# EAGLE board Entrance v0.2 (EAGLE 9.6.2)
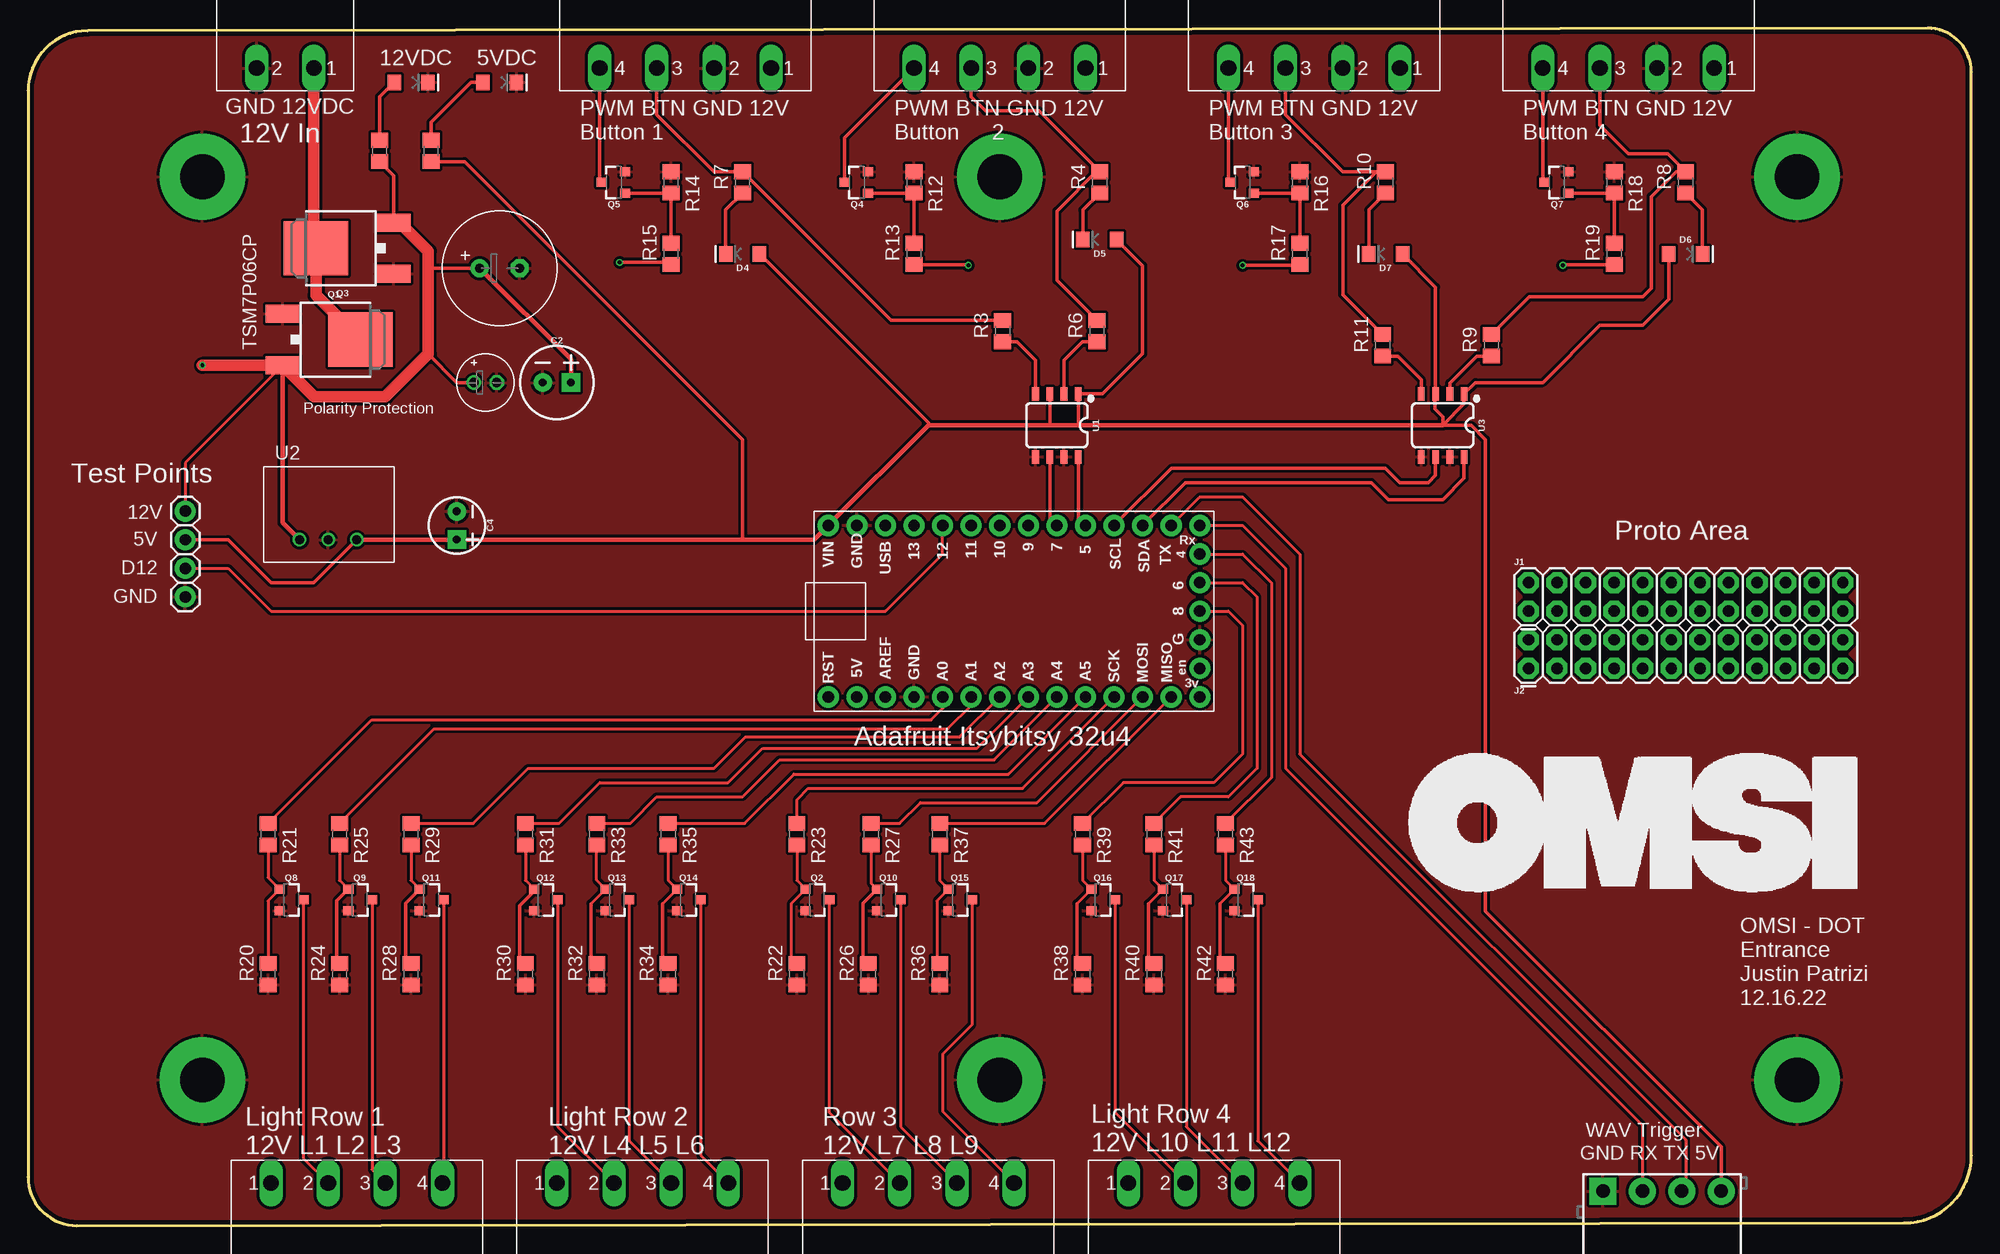
[diagram p0: board, top side]
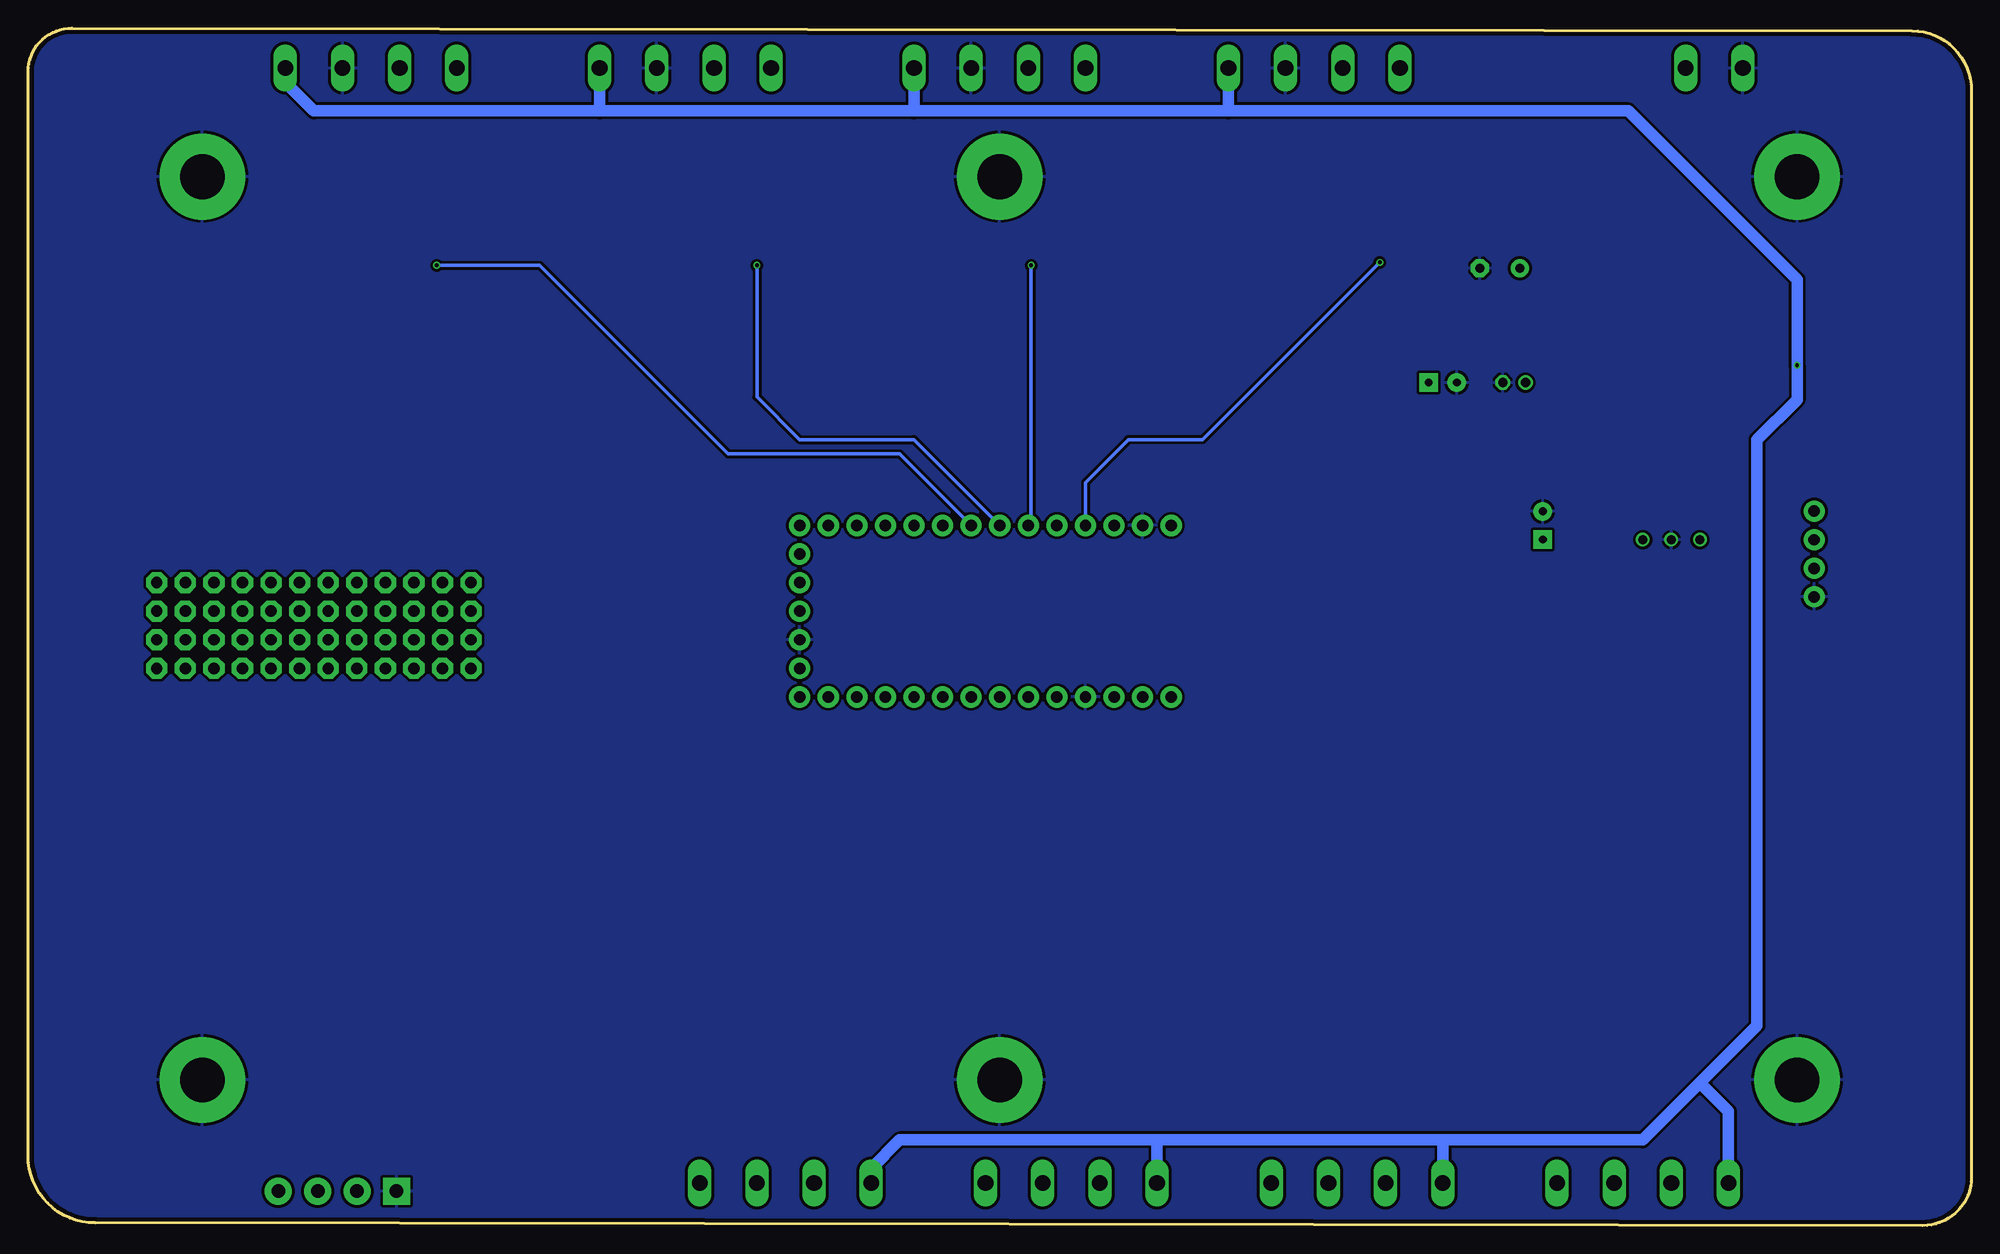
[diagram p1: board, bottom side, seen from below]

Size 172.72 x 106.41 mm. Coordinates in mm from the lower left corner, seen from the top.
Outline: 168.83,106.41 5.28,106.17 arc90 0,100.89 0,4.33 arc90 4.33,0 166.75,0.24 arc90 172.72,6.22 172.72,102.53 arc90 168.83,106.41
Copper layers (1*16): Top 0.035559375mm / dielectric 1.6mm / Bottom 0.035559375mm
Design rules "oshpark-2layer (1) *": minimum track width 10mil, minimum drill 10mil, track to track 8mil, track to pad 8mil, pad to pad 8mil, via to via 8mil, smd to smd 8mil, copper to edge 15mil, drill to drill 6mil, minimum pad ring 5mil, minimum via ring 5mil, stop-mask expansion 2.5mil, vias tented up to drill 25mil, thermal gap 10mil

## Footprints (pad centres in the part's own frame; a part is rotated, then mirrored left to right if it is on the bottom)
1X01 = drill 1.016 pad 1.88: 1 0,0
E2-5 = drill 0.813 pad 1.27: + -1.016,0 | drill 0.813 pad 1.27 octagon: - 1.016,0
CPOL-RADIAL-2.5MM-6.5MM = drill 0.7 pad 1.651 square: 1 1.25,0 | drill 0.7 pad 1.651: 2 -1.25,0
E3,5-10 = drill 0.813 pad 1.6: + -1.778,0 | drill 0.813 pad 1.6 octagon: - 1.778,0
CPOL-RADIAL-2.5MM-5MM-KIT = drill 0.7 pad 1.651 square: 1 1.25,0 | drill 0.7 pad 1.651: 2 -1.25,0
SPARKFUN-LED_LED-1206 = smd 1.2 x 1.4: A -1.5,0; C 1.5,0
LED-1206 = smd 1.2 x 1.4: A -1.5,0; C 1.5,0
2X12 = drill 1.016 pad 1.88 octagon: 1 0,0; 2 0,2.54; 3 2.54,0; 4 2.54,2.54; 5 5.08,0; 6 5.08,2.54; 7 7.62,0; 8 7.62,2.54; 9 10.16,0; 10 10.16,2.54; 11 12.7,0; 12 12.7,2.54; 13 15.24,0; 14 15.24,2.54; 15 17.78,0; 16 17.78,2.54; 17 20.32,0; 18 20.32,2.54; 19 22.86,0; 20 22.86,2.54; 21 25.4,0; 22 25.4,2.54; 23 27.94,0; 24 27.94,2.54
1X04_3.5MM_RA = drill 1.2 pad 2.413 square: 1 -0.228,0.023 | drill 1.2 pad 2.413: 2 3.272,0.023; 3 6.772,0.023; 4 10.272,0.023
DPAK@1 = smd 1.6 x 3: 1 -2.28,-5.31; 3 2.28,-5.31 | smd 4.826 x 5.715: 4 0,1.588
SOT23-3 = smd 0.8 x 0.9: 1 -0.95,-1; 2 0.95,-1; 3 0,1.1
R0805 = smd 1.3 x 1.5: 1 -0.95,0; 2 0.95,0
STANDOFF_ELECTRICAL_5_32 = drill 3.969 pad 7.62: P1 0,0
SO08@1 = smd 0.6 x 1.2: 1 -1.905,-2.8; 2 -0.635,-2.8; 3 0.635,-2.8; 4 1.905,-2.8; 5 1.905,2.8; 6 0.635,2.8; 7 -0.635,2.8; 8 -1.905,2.8
DC-DC_CONVERTER_78XX = drill 0.8: GND 0,0; VIN -2.54,0; VOUT 2.54,0
ADAFRUIT_LENOARDO = drill 1.016 pad 1.88: 3V -10.16,-21.59; 5V -10.16,8.89; A0 -10.16,1.27; A1 -10.16,-1.27; A2 -10.16,-3.81; A3 -10.16,-6.35; A4 -10.16,-8.89; A5 -10.16,-11.43; AREF -10.16,6.35; D4 2.54,-21.59; D5 5.08,-11.43; D6 0,-21.59; D7 5.08,-8.89; D8 -2.54,-21.59; D9 5.08,-6.35; D10 5.08,-3.81; D11 5.08,-1.27; D12 5.08,1.27; D13 5.08,3.81; EN -7.62,-21.59; GND@0 -10.16,3.81; GND@1 -5.08,-21.59; GND@2 5.08,8.89; MISO -10.16,-19.05; MOSI -10.16,-16.51; RES -10.16,11.43; RX 5.08,-21.59; SCK -10.16,-13.97; SCL 5.08,-13.97; SDA 5.08,-16.51; TX 5.08,-19.05; USB 5.08,6.35; VIN 5.08,11.43
MSTBA2 = drill 1.397 long: 1 -2.54,5.08; 2 2.54,5.08
MSTBA4 = drill 1.397 long: 1 -7.62,5.08; 2 -2.54,5.08; 3 2.54,5.08; 4 7.62,5.08

## Placement (x,y rotation side)
5V  [1X01]  13.97,60.95 180 top
12V  [1X01]  13.97,63.49 0 top
C1  10uF  [E2-5]  40.64,74.92 0 top
C2  100uF  [CPOL-RADIAL-2.5MM-6.5MM]  46.99,74.92 0 top
C3  100uF  [E3,5-10]  41.91,85.08 0 top
C4  10uF  [CPOL-RADIAL-2.5MM-5MM-KIT]  38.1,62.22 270 top
D2  RED  [SPARKFUN-LED_LED-1206]  34.04,101.59 0 top
D3  RED  [SPARKFUN-LED_LED-1206]  41.91,101.59 0 top
D4  RED  [LED-1206]  63.5,86.35 180 top
D5  RED  [LED-1206]  95.25,87.62 180 top
D6  RED  [LED-1206]  147.32,86.35 0 top
D7  RED  [LED-1206]  120.65,86.35 180 top
D12  [1X01]  13.97,58.41 90 top
GND  [1X01]  13.97,55.87 180 top
J1  CONN_12X2  [2X12]  133.35,54.6 0 top
J2  CONN_12X2  [2X12]  133.35,49.52 0 top
J3  [1X04_3.5MM_RA]  140.21,3.04 0 top
Q1  MOSFET-PCH  [DPAK@1]  27.18,86.86 90 top
Q2  MOSFET-NCH-IRLML6344TRPBF  [SOT23-3]  70.1,28.95 270 top
Q3  MOSFET-PCH  [DPAK@1]  27.94,78.73 270 top
Q4  MOSFET-NCH-IRLML6344TRPBF  [SOT23-3]  73.66,92.7 90 top
Q5  MOSFET-NCH-IRLML6344TRPBF  [SOT23-3]  52.07,92.7 90 top
Q6  MOSFET-NCH-IRLML6344TRPBF  [SOT23-3]  107.95,92.7 90 top
Q7  MOSFET-NCH-IRLML6344TRPBF  [SOT23-3]  135.89,92.7 90 top
Q8  MOSFET-NCH-IRLML6344TRPBF  [SOT23-3]  23.37,28.95 270 top
Q9  MOSFET-NCH-IRLML6344TRPBF  [SOT23-3]  29.46,28.95 270 top
Q10  MOSFET-NCH-IRLML6344TRPBF  [SOT23-3]  76.45,28.95 270 top
Q11  MOSFET-NCH-IRLML6344TRPBF  [SOT23-3]  35.81,28.95 270 top
Q12  MOSFET-NCH-IRLML6344TRPBF  [SOT23-3]  45.97,28.95 270 top
Q13  MOSFET-NCH-IRLML6344TRPBF  [SOT23-3]  52.32,28.95 270 top
Q14  MOSFET-NCH-IRLML6344TRPBF  [SOT23-3]  58.67,28.95 270 top
Q15  MOSFET-NCH-IRLML6344TRPBF  [SOT23-3]  82.8,28.95 270 top
Q16  MOSFET-NCH-IRLML6344TRPBF  [SOT23-3]  95.5,28.95 270 top
Q17  MOSFET-NCH-IRLML6344TRPBF  [SOT23-3]  101.85,28.95 270 top
Q18  MOSFET-NCH-IRLML6344TRPBF  [SOT23-3]  108.2,28.95 270 top
R1  600  [R0805]  35.81,95.5 90 top
R2  600  [R0805]  31.24,95.5 90 top
R3  220  [R0805]  86.61,79.5 90 top
R4  220  [R0805]  95.25,92.7 90 top
R6  220  [R0805]  95,79.5 90 top
R7  220  [R0805]  63.5,92.7 90 top
R8  220  [R0805]  147.32,92.7 90 top
R9  220  [R0805]  130.05,78.23 90 top
R10  220  [R0805]  120.65,92.7 90 top
R11  220  [R0805]  120.4,78.23 90 top
R12  10k  [R0805]  78.74,92.7 270 top
R13  100  [R0805]  78.74,86.35 90 top
R14  10k  [R0805]  57.15,92.7 270 top
R15  100  [R0805]  57.15,86.35 90 top
R16  10k  [R0805]  113.03,92.7 270 top
R17  100  [R0805]  113.03,86.35 90 top
R18  10k  [R0805]  140.97,92.7 270 top
R19  100  [R0805]  140.97,86.35 90 top
R20  10k  [R0805]  21.34,22.35 90 top
R21  100  [R0805]  21.34,34.79 270 top
R22  10k  [R0805]  68.33,22.35 90 top
R23  100  [R0805]  68.33,34.79 270 top
R24  10k  [R0805]  27.69,22.35 90 top
R25  100  [R0805]  27.69,34.79 270 top
R26  10k  [R0805]  74.68,22.35 90 top
R27  100  [R0805]  74.93,34.79 270 top
R28  10k  [R0805]  34.04,22.35 90 top
R29  100  [R0805]  34.04,34.79 270 top
R30  10k  [R0805]  44.2,22.35 90 top
R31  100  [R0805]  44.2,34.79 270 top
R32  10k  [R0805]  50.55,22.35 90 top
R33  100  [R0805]  50.55,34.79 270 top
R34  10k  [R0805]  56.9,22.35 90 top
R35  100  [R0805]  56.9,34.79 270 top
R36  10k  [R0805]  81.03,22.35 90 top
R37  100  [R0805]  81.03,34.79 270 top
R38  10k  [R0805]  93.73,22.35 90 top
R39  100  [R0805]  93.73,34.79 270 top
R40  10k  [R0805]  100.08,22.35 90 top
R41  100  [R0805]  100.08,34.79 270 top
R42  10k  [R0805]  106.43,22.35 90 top
R43  100  [R0805]  106.43,34.79 270 top
S1  STANDOFF_ELECTRICAL5-32  [STANDOFF_ELECTRICAL_5_32]  15.49,93.21 0 top
S2  STANDOFF_ELECTRICAL5-32  [STANDOFF_ELECTRICAL_5_32]  86.36,93.21 0 top
S3  STANDOFF_ELECTRICAL5-32  [STANDOFF_ELECTRICAL_5_32]  157.23,12.95 0 top
S4  STANDOFF_ELECTRICAL5-32  [STANDOFF_ELECTRICAL_5_32]  157.23,93.21 0 top
S6  STANDOFF_ELECTRICAL5-32  [STANDOFF_ELECTRICAL_5_32]  86.36,12.95 0 top
S8  STANDOFF_ELECTRICAL5-32  [STANDOFF_ELECTRICAL_5_32]  15.49,12.95 0 top
U1  ILD213T-IDL213T  [SO08@1]  91.44,71.11 180 top
U2  R-78E5.0-1.0  [DC-DC_CONVERTER_78XX]  26.67,60.95 0 top
U3  ILD213T-IDL213T  [SO08@1]  125.73,71.11 180 top
U$1  ADAFRUIT_LEONARDO  [ADAFRUIT_LENOARDO]  82.55,57.14 90 top
X1  MSTBA2  [MSTBA2]  22.86,107.94 180 top
X2  MSTBA4  [MSTBA4]  58.42,107.94 180 top
X3  MSTBA4  [MSTBA4]  86.36,107.94 180 top
X4  MSTBA4  [MSTBA4]  114.3,107.94 180 top
X5  MSTBA4  [MSTBA4]  142.24,107.94 180 top
X6  MSTBA4  [MSTBA4]  29.21,-1.28 0 top
X7  MSTBA4  [MSTBA4]  54.61,-1.28 0 top
X8  MSTBA4  [MSTBA4]  80.01,-1.28 0 top
X9  MSTBA4  [MSTBA4]  105.41,-1.28 0 top

## Library data of the parts
5V 12V D12 GND J1 J2 = SparkFun-Connectors
C1 C3 = rcl; SPICEPREFIX: C
C2 = SparkFun-Capacitors; PROD_ID: CAP-08439
C4 = SparkFun-Capacitors; PROD_ID: CAP-08440
D2 D3 J3 Q1 Q3 S1-S4 S6 S8 U$1 = th_libraries
D4-D7 = SparkFun-LED; PROD_ID: DIO-09912
Q2 Q4-Q18 = th_libraries; DESC: 5.0A/29mOhm/30V/2.5V drv capable
R1-R4 R6-R43 = rcl; SPICEPREFIX: R
U1 U3 = th_libraries; PROD_ID: IC-09076
U2 = SparkFun-IC-Power; PROD_ID: COM-13655
X1 = con-phoenix-508; MF: FARNELL; MPN: 1757242; OC_FARNELL: 3705171; OC_NEWARK: 71C4161
X2-X9 = con-phoenix-508; MF: FARNELL; MPN: 1757268; OC_FARNELL: 3705195; OC_NEWARK: 71C4163

## Nets
5V: 5V.1 C4.1 D4.A D5.A D6.A D7.A J3.4 R1.1 U1.1 U1.3 U2.VOUT U3.1 U3.3 U$1.VIN
12V: 12V.1 C1.+ C2.1 C3.+ Q1.3 Q3.3 R2.1 U2.VIN X2.1 X3.1 X4.1 X5.1 X6.1 X7.1 X8.1 X9.1
BUTT1: U1.6 U$1.D7
BUTT2: U1.8 U$1.D5
BUTT3: U3.6 U$1.SCL
BUTT4: U3.8 U$1.SDA
D9: R19.1 U$1.D9
D10: R17.1 U$1.D10
D11: R13.1 U$1.D11
D12: D12.1 U$1.D12
D13: R15.1 U$1.D13
GND: C1.- C2.2 C3.- C4.2 D2.C D3.C GND.1 J3.1 Q1.1 Q2.2 Q3.1 Q4.2 Q5.2 Q6.2 Q7.2 Q8.2 Q9.2 Q10.2 Q11.2 Q12.2 Q13.2 Q14.2 Q15.2 Q16.2 Q17.2 Q18.2 R12.1 R14.1 R16.1 R18.1 R20.1 R22.1 R24.1 R26.1 R28.1 R30.1 R32.1 R34.1 R36.1 R38.1 R40.1 R42.1 S1.P1 S2.P1 S3.P1 S4.P1 S6.P1 S8.P1 U1.5 U1.7 U2.GND U3.5 U3.7 U$1.GND@0 U$1.GND@1 U$1.GND@2 X1.2 X2.2 X3.2 X4.2 X5.2
LIGHT1: R21.1 U$1.A0
LIGHT2: R25.1 U$1.A1
LIGHT3: R29.1 U$1.A2
LIGHT4: R31.1 U$1.A3
LIGHT5: R33.1 U$1.A4
LIGHT6: R35.1 U$1.A5
LIGHT7: R23.1 U$1.SCK
LIGHT8: R27.1 U$1.MOSI
LIGHT9: R37.1 U$1.MISO
LIGHT10: R39.1 U$1.D8
LIGHT11: R41.1 U$1.D6
LIGHT12: R43.1 U$1.D4
LIGHTPWM1: Q8.3 X6.2
LIGHTPWM2: Q9.3 X6.3
LIGHTPWM3: Q11.3 X6.4
LIGHTPWM4: Q12.3 X7.2
LIGHTPWM5: Q13.3 X7.3
LIGHTPWM6: Q14.3 X7.4
LIGHTPWM7: Q2.3 X8.2
LIGHTPWM8: Q10.3 X8.3
LIGHTPWM9: Q15.3 X8.4
LIGHTPWM10: Q16.3 X9.2
LIGHTPWM11: Q17.3 X9.3
LIGHTPWM12: Q18.3 X9.4
N$1: R3.1 U1.4
N$3: D2.A R2.2
N$4: D6.C R8.1
N$5: D3.A R1.2
N$6: D4.C R7.1
N$7: D5.C R4.1
N$8: R3.2 R7.2 X2.3
N$9: R6.1 U1.2
N$10: R4.2 R6.2 X3.3
N$11: R9.1 U3.2
N$12: R8.2 R9.2 X5.3
N$13: D7.C R10.1
N$14: R10.2 R11.2 X4.3
N$15: R11.1 U3.4
N$16: Q5.1 R14.2 R15.2
N$17: Q6.1 R16.2 R17.2
N$18: Q7.1 R18.2 R19.2
N$19: Q1.4 Q3.4 X1.1
N$20: Q8.1 R20.2 R21.2
N$21: Q2.1 R22.2 R23.2
N$22: Q9.1 R24.2 R25.2
N$23: Q10.1 R26.2 R27.2
N$24: Q11.1 R28.2 R29.2
N$25: Q4.1 R12.2 R13.2
N$26: Q12.1 R30.2 R31.2
N$27: Q13.1 R32.2 R33.2
N$28: Q14.1 R34.2 R35.2
N$29: Q15.1 R36.2 R37.2
N$30: Q16.1 R38.2 R39.2
N$31: Q17.1 R40.2 R41.2
N$32: Q18.1 R42.2 R43.2
PWMBUTT1: Q5.3 X2.4
PWMBUTT2: Q4.3 X3.4
PWMBUTT3: Q6.3 X4.4
PWMBUTT4: Q7.3 X5.4
RX: J3.2 U$1.RX
TX: J3.3 U$1.TX

## Tracks (layer width: path | path; a pad name or v marks a point on that pad's centre or on a via)
5V
  Top 0.305: 5V.1 17.78,60.95 21.59,57.14 25.4,57.14 U2.VOUT | D6.A 145.82,82.31 143.51,80 139.7,80 134.62,74.92 128.65,74.92 U3.1 127.63,73.02 125.73,71.11 | D7.A 125.09,83.41 U3.3 125.03,73.85 125.03,72.58 125.73,71.88 125.73,71.11 | D5.A 99.06,85.31 99.06,77.46 95.51,73.91 U1.1 93.34,71.24 93.22,71.11 | U1.3 90.81,71.24 90.93,71.11 | 80.01,71.11 80.01,71.34 D4.A | R1.1 38.8,94.55 63.5,69.84 63.5,60.97 | 125.73,71.11 128.27,71.11 129.54,69.84 129.54,27.93 150.48,6.99 J3.4
  Top 0.406: U2.VOUT 29.23,60.97 C4.1 63.5,60.97 69.87,60.97 U$1.VIN 80.01,71.11 90.93,71.11 93.22,71.11 125.73,71.11
12V  (via drill 0.35)
  Top 0.254: Q3.3 13.97,67.79 12V.1
  Top 0.305: R2.1 32.49,93.3 Q1.3 | C3.+ 35.56,85.08 | C1.+ 38.1,74.92 35.56,77.46
  Top 0.406: Q3.3 22.63,62.45 U2.VIN | Q1.3 33.02,89.14 | C3.+ 48.24,76.98 C2.1
  Top 1.016: v15.49,76.45 v15.5,76.45 Q3.3 25.43,73.65 31.75,73.65 35.56,77.46 35.56,85.08 35.56,86.6 33.02,89.14
  Bottom 1.016: 66.04,99.05 93.98,99.05 | 93.98,99.05 121.92,99.05 | 121.92,99.05 147.32,99.05 149.86,101.59 X5.1 | X4.1 121.92,99.05 | X3.1 93.98,99.05 | X2.1 66.04,99.05 | 24.13,12.69 19.05,17.77 19.05,69.84 15.49,73.4 v15.49,76.45 15.49,84.07 30.48,99.05 66.04,99.05 | 24.13,12.69 29.21,7.61 46.99,7.61 | 46.99,7.61 72.39,7.61 | 72.39,7.61 95.25,7.61 97.79,5.07 X9.1 | 24.13,12.69 21.59,10.15 X6.1 | 46.99,7.61 X7.1 | 72.39,7.61 X8.1
BUTT1
  Top 0.305: U1.6 90.81,62.86 U$1.D7
BUTT2
  Top 0.305: U1.8 93.34,62.86 U$1.D5
BUTT3
  Top 0.305: U3.6 125.09,66.67 124.46,66.03 121.92,66.03 120.65,67.3 101.6,67.3 U$1.SCL
BUTT4
  Top 0.305: U3.8 127.63,66.41 125.73,64.51 120.9,64.51 119.38,66.03 102.87,66.03 U$1.SDA
D9  (via drill 0.35)
  Top 0.305: R19.1 136.46,85.4 v136.4,85.34
  Bottom 0.305: v136.4,85.34 127.25,85.34 110.49,68.57 95.25,68.57 U$1.D9
D10  (via drill 0.35)
  Top 0.305: R17.1 112.96,85.34 v107.95,85.34
  Bottom 0.305: v107.95,85.34 107.95,73.65 104.14,69.84 93.98,69.84 U$1.D10
D11  (via drill 0.35)
  Top 0.305: R13.1 83.5,85.4 v83.57,85.34
  Bottom 0.305: v83.57,85.34 83.57,62.48 U$1.D11
D12
  Top 0.254: D12.1 17.78,58.41 21.59,54.6 76.2,54.6 81.28,59.68 U$1.D12
D13  (via drill 0.35)
  Top 0.305: R15.1 56.96,85.59 v52.58,85.59
  Bottom 0.305: v52.58,85.59 68.33,69.84 74.93,69.84 78.74,66.03 U$1.D13
GND
  pour Top (isolate 0.254): 0,107.94 173.25,107.94 173.25,1.79 170.18,-1.28 3.59,-1.28 arc-45 1.8,-0.53 0,1.26
  pour Bottom (isolate 0.254): 2.01,107.42 174.52,107.42 174.52,4.33 168.91,-1.28 4.86,-1.28 arc-45 3.07,-0.53 0,2.53 0,104.35 arc-45 0.74,106.15
LIGHT1
  Top 0.254: R21.1 30.55,44.95 80.26,44.95 81.28,45.97 U$1.A0
LIGHT2
  Top 0.254: U$1.A1 83.82,46.22 81.74,44.14 36.08,44.14 R25.1
LIGHT3
  Top 0.254: U$1.A2 82.8,43.43 63.75,43.43 60.96,40.63 44.45,40.63 39.56,35.74 R29.1
LIGHT4
  Top 0.254: R31.1 47.18,35.74 50.8,39.36 62.23,39.36 65.28,42.41 84.33,42.41 U$1.A3
LIGHT5
  Top 0.254: R33.1 53.53,35.74 55.88,38.09 63.5,38.09 66.8,41.4 85.85,41.4 U$1.A4
LIGHT6
  Top 0.254: R35.1 63.69,35.74 68.07,40.13 87.12,40.13 U$1.A5
LIGHT7
  Top 0.254: U$1.SCK 88.39,38.86 69.34,38.86 68.33,37.84 R23.1
LIGHT8
  Top 0.254: U$1.MOSI 89.66,37.59 79.31,37.59 77.47,35.74 R27.1
LIGHT9
  Top 0.254: R37.1 90.36,35.74 U$1.MISO
LIGHT10
  Top 0.254: U$1.D8 106.68,54.6 107.95,53.33 107.95,41.9 105.41,39.36 97.35,39.36 R39.1
LIGHT11
  Top 0.254: U$1.D6 107.95,57.14 109.22,55.87 109.22,40.63 106.68,38.09 102.43,38.09 R41.1
LIGHT12
  Top 0.254: U$1.D4 107.95,59.68 110.49,57.14 110.49,39.81 R43.1
LIGHTPWM1
  Top 0.254: Q8.3 24.47,6.01 X6.2
LIGHTPWM2
  Top 0.254: Q9.3 30.56,4.99 X6.3
LIGHTPWM3
  Top 0.254: Q11.3 36.91,3.89 X6.4
LIGHTPWM4
  Top 0.254: Q12.3 47.07,8.8 X7.2
LIGHTPWM5
  Top 0.254: Q13.3 53.42,7.53 X7.3
LIGHTPWM6
  Top 0.254: Q14.3 59.77,6.26 X7.4
LIGHTPWM7
  Top 0.254: Q2.3 71.2,10.07 X8.2
LIGHTPWM8
  Top 0.254: Q10.3 77.55,8.8 X8.3
LIGHTPWM9
  Top 0.254: Q15.3 83.9,17.86 81.28,15.23 81.28,10.15 X8.4
LIGHTPWM10
  Top 0.254: Q16.3 96.6,10.07 X9.2
LIGHTPWM11
  Top 0.254: Q17.3 102.95,8.8 X9.3
LIGHTPWM12
  Top 0.254: Q18.3 109.3,7.53 X9.4
N$1
  Top 0.305: R3.1 87.88,78.55 89.53,76.89 U1.4
N$3
  Top 0.305: R2.2 31.24,100.3 D2.A
N$4
  Top 0.305: R8.1 148.82,90.25 D6.C
N$5
  Top 0.305: R1.2 35.81,98.04 39.37,101.59 D3.A
N$6
  Top 0.305: R7.1 62,90.25 D4.C
N$7
  Top 0.305: R4.1 93.75,90.25 D5.C
N$8
  Top 0.305: X2.3 55.88,98.73 60.96,93.65 R7.2 64.39,92.76 64.4,92.76 76.71,80.45 R3.2
N$9
  Top 0.305: R6.1 93.73,78.55 92.07,76.89 U1.2
N$10
  Top 0.305: R4.2 95.09,93.81 | 95.09,93.81 89.85,99.05 85.09,99.05 83.82,100.32 X3.3 | R6.2 91.44,84 91.44,90.16 95.09,93.81
N$11
  Top 0.305: R9.1 128.78,77.28 126.37,74.86 U3.2
N$12
  Top 0.305: R9.2 133.42,82.54 143.51,82.54 144.27,83.31 144.27,91.43 146.49,93.65 R8.2 145.73,95.24 142.24,95.24 139.7,97.78 X5.3
N$13
  Top 0.305: R10.1 119.15,90.25 D7.C
N$14
  Top 0.305: X4.3 111.76,98.73 116.84,93.65 R10.2 119.82,93.65 116.84,90.67 116.84,82.73 R11.2
N$15
  Top 0.305: R11.1 121.73,77.28 123.82,75.18 U3.4
N$16
  Top 0.305: Q5.1 R14.2 R15.2
N$17
  Top 0.305: R16.2 113.03,91.43 | 113.03,91.43 R17.2 | Q6.1 112.71,91.75 113.03,91.43
N$18
  Top 0.305: R19.2 R18.2 Q7.1
N$19
  Top 0.813: 25.4,86.35 25.59,86.54 Q1.4
  Top 1.016: X1.1 25.4,86.35 | Q1.4 25.59,82.67 Q3.4
N$20
  Top 0.254: R20.2 21.34,28.87 Q8.1 21.34,30.93 R21.2
N$21
  Top 0.254: R23.2 68.33,30.68 Q2.1 67.82,28.61 67.82,23.8 R22.2
N$22
  Top 0.254: R25.2 27.69,30.68 Q9.1
  Top 0.305: Q9.1 27.43,28.87 27.43,23.55 R24.2
N$23
  Top 0.254: R27.2 74.93,30.42 Q10.1
  Top 0.305: Q10.1 74.21,28.65 74.21,23.76 R26.2
N$24
  Top 0.254: R29.2 34.04,30.68 Q11.1
  Top 0.305: R28.2 33.57,23.76 33.57,28.65 Q11.1
N$25
  Top 0.305: R13.2 R12.2 Q4.1
N$26
  Top 0.254: R31.2 44.2,30.68 Q12.1
  Top 0.305: Q12.1 44.97,29.73 43.69,28.44 43.69,23.8 R30.2
N$27
  Top 0.254: R33.2 50.55,30.68 Q13.1 50.04,28.61
  Top 0.305: 50.04,28.61 50.04,23.8 R32.2
N$28
  Top 0.254: R35.2 56.9,30.68 Q14.1 56.39,28.61
  Top 0.305: 56.39,28.61 56.39,23.8 R34.2
N$29
  Top 0.254: R37.2 81.03,30.68 Q15.1 80.77,28.87 80.77,23.55 R36.2
N$30
  Top 0.254: R39.2 93.73,30.68 Q16.1 93.22,28.61
  Top 0.305: 93.22,28.61 93.22,23.8 R38.2
N$31
  Top 0.254: 99.57,28.61 Q17.1 100.08,30.68 R41.2
  Top 0.305: 99.57,28.61 99.57,23.8 R40.2
N$32
  Top 0.254: R43.2 106.43,30.68 Q18.1 105.92,28.61
  Top 0.305: 105.92,28.61 105.92,23.8 R42.2
PWMBUTT1
  Top 0.305: X2.4 50.8,92.87 Q5.3
PWMBUTT2
  Top 0.305: X3.4 72.56,96.68 Q4.3
PWMBUTT3
  Top 0.305: X4.4 106.68,92.87 Q6.3
PWMBUTT4
  Top 0.305: X5.4 134.62,92.87 Q7.3
RX
  Top 0.254: U$1.RX 107.95,62.22 111.76,58.41 111.76,40.63 143.48,8.91 J3.2
TX
  Top 0.254: U$1.TX 104.14,64.76 107.95,64.76 113.03,59.68 113.03,41.9 147.32,7.61 147.32,3.4 J3.3

## Text on the board
tPlace: 12VDC | 5VDC | GND 12VDC | 12V In | TSM7P06CP | Polarity Protection | Proto Area | Adafruit Itsybitsy 32u4 | WAV Trigger | GND RX TX 5V
tNames: PWM BTN GND 12V / Button 1 | PWM BTN GND 12V / Button 2 | PWM BTN GND 12V / Button 3 | PWM BTN GND 12V / Button 4 | Test Points | OMSI - DOT / Entrance / Justin Patrizi / 12.16.22 | Light Row 1 / 12V L1 L2 L3 | Light Row 2 / 12V L4 L5 L6 | Row 3 / 12V L7 L8 L9 | Light Row 4 / 12V L10 L11 L12